# Altium PCB bdcmc25_revised.PcbDoc (part 3 of 4)
Units mm, origin at the board's own origin, x right, y up, seen from the top; angles counter-clockwise.
Board outline 177.8 x 69.85 mm, 4 copper layers (Top Layer, Layer 2 (GND), Layer 3 (GND), Bottom Layer), stack 0.603 mm thick; 363 components, 158 nets, 1074 pads, 732 vias.
Unrouted connection lines stored in the file: 6.
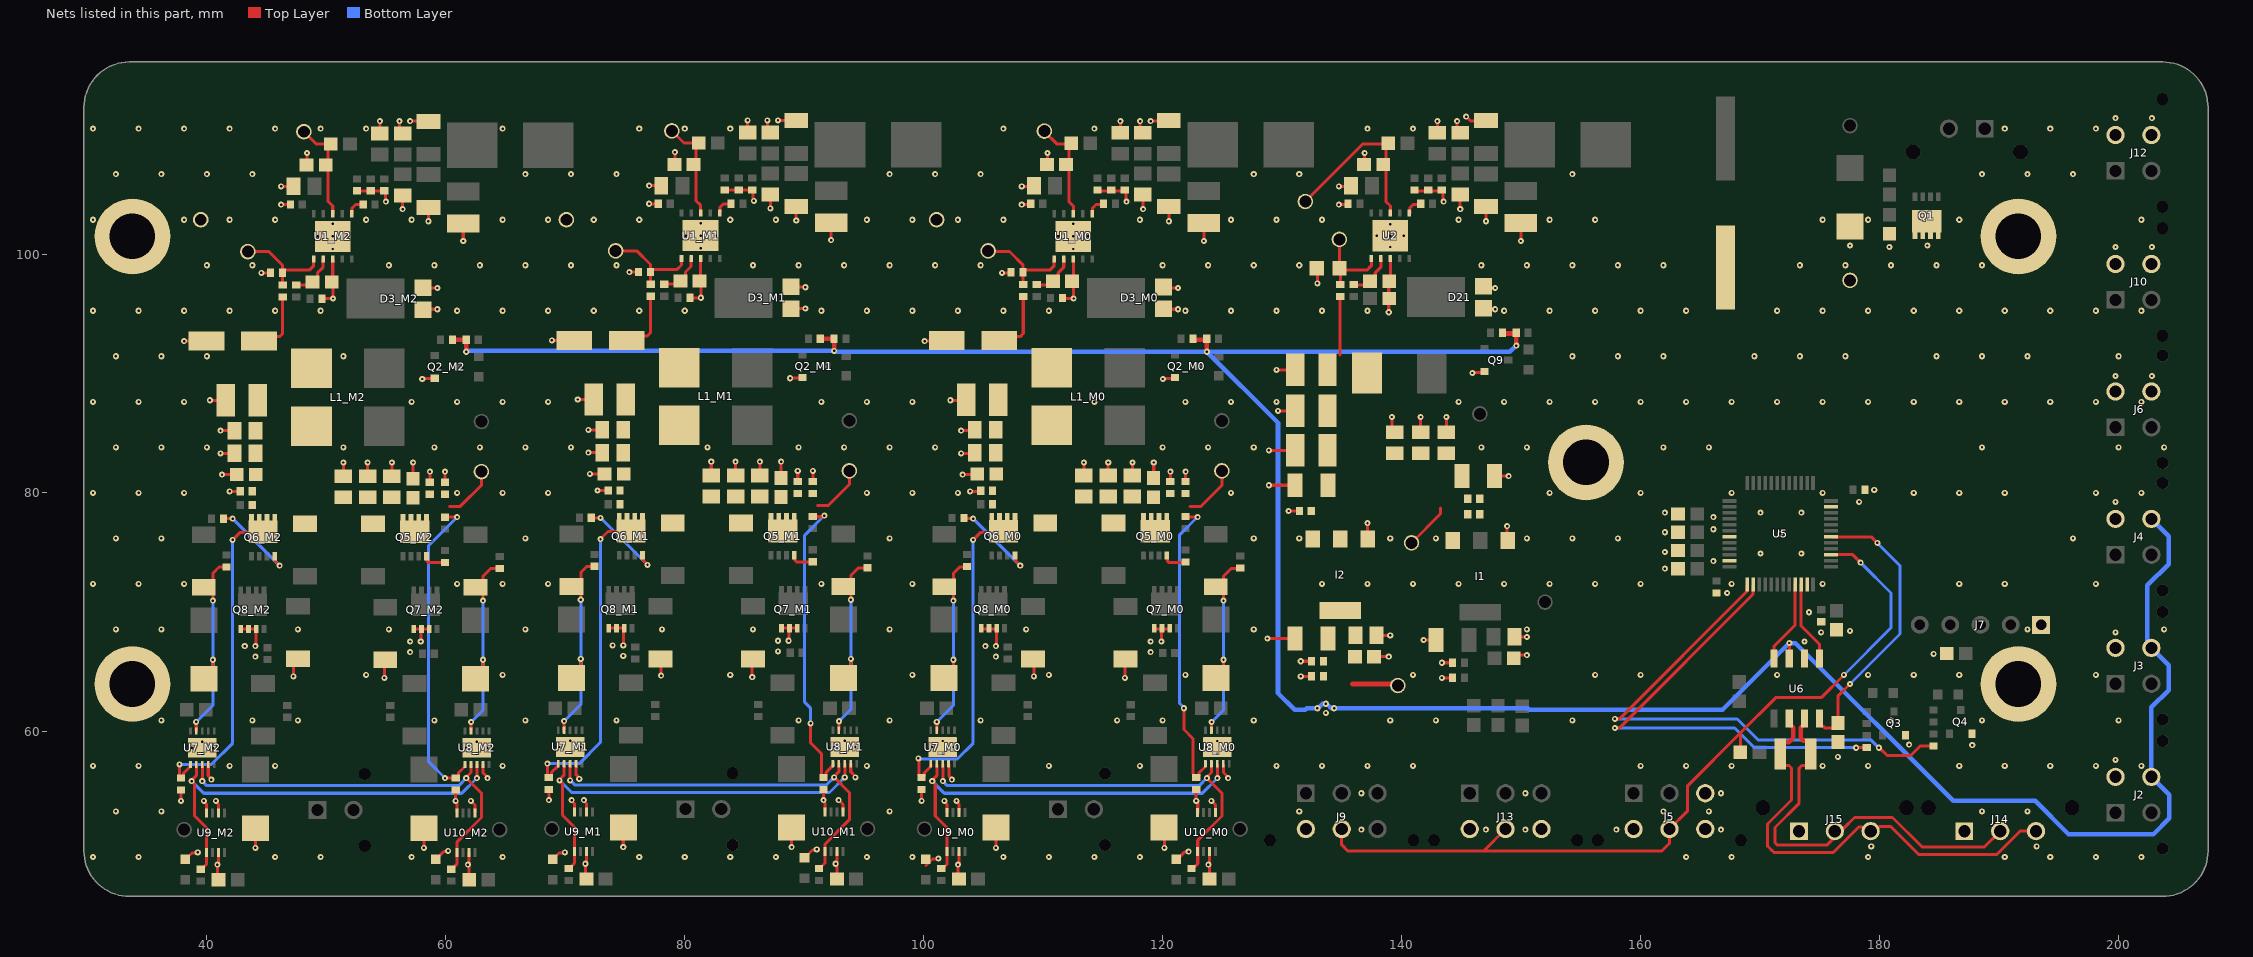
[diagram p4: the nets of this part, all layers, seen from the top]

## Via types
v1: diameter 0.508, hole 0.203, Top Layer to Bottom Layer, 717 vias
v2: diameter 0.508, hole 0.2, Top Layer to Bottom Layer, 15 vias

## Nets (pads, with @x,y where several pads share a name; then routed paths per layer and width w, separated by ;. In a path a pad name is that pad's centre, name@x,y a point inside that pad or via, vN(x,y) a via of type N, cw(c..) or ccw(c..) an arc to the next point about the centre after c; other vN are vias at no path point) (continued)
GND: (continued)
  other v1: 30.48,49.53 34.29,49.53 45.72,49.53 49.53,49.53 57.15,49.53 64.77,49.53 76.2,49.53 80.01,49.53 83.82,49.53 87.63,49.53 95.25,49.53 99.06,49.53 106.68,49.53 110.49,49.53 114.3,49.53 118.11,49.53 163.83,49.53 167.64,49.53 179.07,49.53 190.5,49.53 194.31,49.53 198.12,49.53 201.93,49.53 179.324,50.419 193.167,50.419 136.652,51.816 147.066,51.816 150.368,51.816 157.988,51.816 166.751,51.816 32.385,53.34 36.195,53.34 97.155,53.34 131.445,53.34 161.925,53.34 165.735,53.34 188.595,53.34 192.405,53.34 136.652,54.864 150.368,54.864 166.751,54.864 30.48,57.15 34.29,57.15 41.91,57.15 45.72,57.15 64.77,57.15 95.25,57.15 110.49,57.15 118.11,57.15 129.54,57.15 133.35,57.15 137.16,57.15 140.97,57.15 160.02,57.15 163.83,57.15 167.64,57.15 175.26,57.15 179.07,57.15 186.69,57.15 190.5,57.15 194.31,57.15 198.12,57.15 201.93,57.15 199.771,57.658 176.53,57.912 187.778,58.891 182.499,58.928 36.195,60.96 43.815,60.96 47.625,60.96 59.055,60.96 66.675,60.96 74.295,60.96 89.535,60.96 97.155,60.96 104.775,60.96 116.205,60.96 120.015,60.96 127.635,60.96 139.065,60.96 142.875,60.96 154.305,60.96 180.975,60.96 188.595,60.96 200.025,60.96 53.34,64.77 64.77,64.77 83.82,64.77 99.06,64.77 110.49,64.77 121.92,64.77 140.97,64.77 156.21,64.77 160.02,64.77 171.45,64.77 179.07,64.77 182.88,64.77 186.69,64.77 198.12,64.77 44.069,66.294 106.058,66.294 74.862,66.359 184.541,66.535 57.023,66.675 119.012,66.675 87.816,66.74 43.18,67.183 105.169,67.183 73.973,67.248 57.023,67.564 119.012,67.564 173.736,67.564 87.816,67.629 175.133,68.326 199.771,68.326 177.546,68.453 32.385,68.58 36.195,68.58 47.625,68.58 55.245,68.58 66.675,68.58 78.105,68.58 85.725,68.58 97.155,68.58 108.585,68.58 127.635,68.58 150.495,68.58 192.405,68.58 203.835,68.58 174.117,70.011 167.259,71.628 30.48,72.39 34.29,72.39 38.1,72.39 60.96,72.39 64.77,72.39 68.58,72.39 91.44,72.39 99.06,72.39 133.35,72.39 137.16,72.39 140.97,72.39 144.78,72.39 148.59,72.39 152.4,72.39 156.21,72.39 160.02,72.39 167.64,72.39 175.26,72.39 186.69,72.39 190.5,72.39 198.12,72.39 162.052,73.66 166.116,74.295 170.053,74.93 173.482,74.93 162.052,75.057 32.385,76.2 36.195,76.2 66.675,76.2 97.155,76.2 127.635,76.2 131.445,76.2 139.065,76.2 142.875,76.2 150.495,76.2 154.305,76.2 158.115,76.2 196.215,76.2 171.704,76.581 162.052,76.708 166.116,76.962 166.116,77.978 162.052,78.359 170.053,78.359 173.482,78.359 178.308,79.248 199.771,79.248 30.48,80.01 34.29,80.01 38.1,80.01 60.96,80.01 64.77,80.01 68.58,80.01 95.25,80.01 99.06,80.01 102.87,80.01 125.73,80.01 152.4,80.01 160.02,80.01 167.64,80.01 175.26,80.01 182.88,80.01 186.69,80.01 190.5,80.01 198.12,80.01 201.93,80.01 179.578,80.264 32.385,83.82 36.195,83.82 40.005,83.82 51.435,83.82 59.055,83.82 62.865,83.82 66.675,83.82 70.485,83.82 81.915,83.82 89.535,83.82 93.345,83.82 97.155,83.82 100.965,83.82 120.015,83.82 123.825,83.82 127.635,83.82 146.685,83.82 150.495,83.82 161.925,83.82 165.735,83.82 188.595,83.82 200.025,83.82 203.835,83.82 30.48,87.63 34.29,87.63 38.1,87.63 57.15,87.63 60.96,87.63 64.77,87.63 68.58,87.63 91.44,87.63 95.25,87.63 99.06,87.63 114.3,87.63 121.92,87.63 125.73,87.63 129.54,87.63 144.78,87.63 148.59,87.63 152.4,87.63 156.21,87.63 160.02,87.63 163.83,87.63 167.64,87.63 171.45,87.63 175.26,87.63 179.07,87.63 182.88,87.63 186.69,87.63 190.5,87.63 194.31,87.63 198.12,87.63 201.93,87.63 199.771,89.789 202.819,89.789 32.385,91.44 36.195,91.44 40.005,91.44 51.435,91.44 154.305,91.44 158.115,91.44 161.925,91.44 169.545,91.44 173.355,91.44 177.165,91.44 184.785,91.44 188.595,91.44 192.405,91.44 200.025,91.44 30.48,95.25 34.29,95.25 38.1,95.25 41.91,95.25 45.72,95.25 49.53,95.25 60.96,95.25 64.77,95.25 68.58,95.25 72.39,95.25 76.2,95.25 80.01,95.25 91.44,95.25 95.25,95.25 99.06,95.25 102.87,95.25 106.68,95.25 110.49,95.25 121.92,95.25 125.73,95.25 129.54,95.25 133.35,95.25 137.16,95.25 148.59,95.25 152.4,95.25 156.21,95.25 160.02,95.25 163.83,95.25 171.45,95.25 175.26,95.25 179.07,95.25 182.88,95.25 186.69,95.25 190.5,95.25 194.31,95.25 198.12,95.25 201.93,95.25 40.005,99.06 43.815,99.06 55.245,99.06 59.055,99.06 62.865,99.06 66.675,99.06 70.485,99.06 74.295,99.06 85.725,99.06 89.535,99.06 93.345,99.06 97.155,99.06 100.965,99.06 104.775,99.06 120.015,99.06 123.825,99.06 127.635,99.06 131.445,99.06 146.685,99.06 150.495,99.06 154.305,99.06 158.115,99.06 161.925,99.06 173.355,99.06 177.165,99.06 180.975,99.06 184.785,99.06 188.595,99.06 139.065,100.584 180.848,100.584 199.771,100.584 202.819,100.584 177.546,100.711 184.023,100.711 137.922,101.529 139.065,101.529 140.208,101.529 139.065,102.489 30.48,102.87 38.1,102.87 41.91,102.87 45.72,102.87 53.34,102.87 57.15,102.87 64.77,102.87 68.58,102.87 72.39,102.87 76.2,102.87 83.82,102.87 87.63,102.87 95.25,102.87 99.06,102.87 102.87,102.87 106.68,102.87 118.11,102.87 125.73,102.87 129.54,102.87 133.35,102.87 144.78,102.87 152.4,102.87 156.21,102.87 175.26,102.87 179.07,102.87 186.69,102.87 201.93,102.87 32.385,106.68 36.195,106.68 40.005,106.68 43.815,106.68 66.675,106.68 70.485,106.68 74.295,106.68 97.155,106.68 100.965,106.68 104.775,106.68 127.635,106.68 131.445,106.68 154.305,106.68 188.595,106.68 192.405,106.68 196.215,106.68 30.48,110.49 34.29,110.49 38.1,110.49 41.91,110.49 45.72,110.49 49.53,110.49 53.34,110.49 64.77,110.49 76.2,110.49 80.01,110.49 83.82,110.49 106.68,110.49 114.3,110.49 137.16,110.49 140.97,110.49 190.5,110.49 194.31,110.49 198.12,110.49 199.771,111.379 202.819,111.379
  other v2: 50.546,100.423 112.522,100.423 81.339,100.488 49.296,101.473 50.546,101.473 51.796,101.473 111.272,101.473 112.522,101.473 113.772,101.473 80.089,101.538 81.339,101.538 82.589,101.538 50.546,102.523 112.522,102.523 81.339,102.588
HO_1G_M0: D6_M0.2 D13_M0.2 R22_M0.1 U7_M0.4 | length 17.7
  Top Layer w0.254: v1(101.105,60.833) 101.109,60.829 101.109,60.078 U7_M0.4@101.113,60.074 ; D13_M0.2@101.74,64.445 102.502,65.207 v1(102.502,66.04) ; D6_M0.2@101.74,72.095 D6_M0.2@101.929,72.095 ; v1(102.502,70.993) 102.502,71.522 D6_M0.2@101.929,72.095 ; R22_M0.1@103.645,73.795 103.018,73.795 102.502,73.279 102.502,72.668 D6_M0.2@101.929,72.095
  Bottom Layer w0.254: v1(101.105,60.833) 102.502,62.23 v1(102.502,66.04) v1(102.502,70.993)
HO_1G_M1: D6_M1.2 D13_M1.2 R22_M1.1 U7_M1.4 | length 17.7
  Top Layer w0.254: v1(69.909,60.898) 69.913,60.894 69.913,60.143 U7_M1.4@69.917,60.139 ; D13_M1.2@70.544,64.51 71.306,65.272 v1(71.306,66.105) ; D6_M1.2@70.544,72.16 D6_M1.2@70.733,72.16 ; v1(71.306,71.058) 71.306,71.587 D6_M1.2@70.733,72.16 ; R22_M1.1@72.449,73.86 71.822,73.86 71.306,73.344 71.306,72.733 D6_M1.2@70.733,72.16
  Bottom Layer w0.254: v1(69.909,60.898) 71.306,62.295 v1(71.306,66.105) v1(71.306,71.058)
HO_1G_M2: D6_M2.2 D13_M2.2 R22_M2.1 U7_M2.4 | length 17.7
  Top Layer w0.254: v1(39.116,60.833) 39.12,60.829 39.12,60.078 U7_M2.4@39.124,60.074 ; D13_M2.2@39.751,64.445 40.513,65.207 v1(40.513,66.04) ; D6_M2.2@39.751,72.095 D6_M2.2@39.94,72.095 ; v1(40.513,70.993) 40.513,71.522 D6_M2.2@39.94,72.095 ; R22_M2.1@41.656,73.795 41.029,73.795 40.513,73.279 40.513,72.668 D6_M2.2@39.94,72.095
  Bottom Layer w0.254: v1(39.116,60.833) 40.513,62.23 v1(40.513,66.04) v1(40.513,70.993)
HO_1M_M0: Q6_M0.1 R23_M0.2 | length 7.3
  Top Layer w0.254: R23_M0.2@103.383,77.851 v1(104.153,77.851) ; Q6_M0.1@107.675,74.708 107.709,74.674 107.709,74.295 v1(108.09,73.914)
  Bottom Layer w0.254: v1(104.153,77.851) v1(108.09,73.914)
HO_1M_M1: Q6_M1.1 R23_M1.2 | length 7.3
  Top Layer w0.254: R23_M1.2@72.187,77.916 v1(72.957,77.916) ; Q6_M1.1@76.479,74.773 76.513,74.739 76.513,74.36 v1(76.894,73.979)
  Bottom Layer w0.254: v1(72.957,77.916) v1(76.894,73.979)
HO_1M_M2: Q6_M2.1 R23_M2.2 | length 7.3
  Top Layer w0.254: R23_M2.2@41.394,77.851 v1(42.164,77.851) ; Q6_M2.1@45.686,74.708 45.72,74.674 45.72,74.295 v1(46.101,73.914)
  Bottom Layer w0.254: v1(42.164,77.851) v1(46.101,73.914)
HO_2G_M0: D7_M0.2 D14_M0.2 R25_M0.1 U8_M0.4 | length 17.4
  Top Layer w0.254: U8_M0.4@124.1,60.074 124.107,60.081 124.107,60.261 124.116,60.271 v1(124.116,60.825) ; D14_M0.2@124.473,64.445 125.108,65.08 v1(125.108,66.04) ; D7_M0.2@124.473,72.095 124.535,72.095 D7_M0.2@124.662,71.968 ; D7_M0.2@124.773,71.968 D7_M0.2@124.662,71.968 ; D7_M0.2@124.773,72.095 125.11,72.432 125.11,73.027 125.751,73.668 R25_M0.1@126.505,73.668 ; v1(125.108,70.993) 125.108,71.522 D7_M0.2@124.662,71.968
  Bottom Layer w0.254: v1(124.116,60.825) 125.108,61.816 v1(125.108,66.04) v1(125.108,70.993)
HO_2G_M1: D7_M1.2 D14_M1.2 R25_M1.1 U8_M1.4 | length 17.4
  Top Layer w0.254: U8_M1.4@92.904,60.139 92.911,60.146 92.911,60.326 92.921,60.336 v1(92.921,60.89) ; D14_M1.2@93.277,64.51 93.912,65.145 v1(93.912,66.105) ; D7_M1.2@93.277,72.16 93.339,72.16 D7_M1.2@93.466,72.033 ; D7_M1.2@93.577,72.033 D7_M1.2@93.466,72.033 ; D7_M1.2@93.577,72.16 93.914,72.497 93.914,73.092 94.555,73.733 R25_M1.1@95.309,73.733 ; v1(93.912,71.058) 93.912,71.587 D7_M1.2@93.466,72.033
  Bottom Layer w0.254: v1(92.921,60.89) 93.912,61.881 v1(93.912,66.105) v1(93.912,71.058)
HO_2G_M2: D7_M2.2 D14_M2.2 R25_M2.1 U8_M2.4 | length 17.4
  Top Layer w0.254: U8_M2.4@62.111,60.074 62.118,60.081 62.118,60.261 62.128,60.271 v1(62.128,60.825) ; D14_M2.2@62.484,64.445 63.119,65.08 v1(63.119,66.04) ; D7_M2.2@62.484,72.095 62.546,72.095 D7_M2.2@62.673,71.968 ; D7_M2.2@62.784,71.968 D7_M2.2@62.673,71.968 ; D7_M2.2@62.784,72.095 63.121,72.432 63.121,73.027 63.762,73.668 R25_M2.1@64.516,73.668 ; v1(63.119,70.993) 63.119,71.522 D7_M2.2@62.673,71.968
  Bottom Layer w0.254: v1(62.128,60.825) 63.119,61.816 v1(63.119,66.04) v1(63.119,70.993)
HO_2M_M0: Q5_M0.1 R24_M0.1 | length 2
  Top Layer w0.254: Q5_M0.1@120.375,74.708 120.409,74.674 120.409,74.317 120.557,74.168 121.925,74.168 R24_M0.1@121.933,74.176
HO_2M_M1: Q5_M1.1 R24_M1.1 | length 2
  Top Layer w0.254: Q5_M1.1@89.179,74.773 89.213,74.739 89.213,74.382 89.362,74.233 90.729,74.233 R24_M1.1@90.737,74.241
HO_2M_M2: Q5_M2.1 R24_M2.1 | length 2
  Top Layer w0.254: Q5_M2.1@58.386,74.708 58.42,74.674 58.42,74.317 58.569,74.168 59.936,74.168 R24_M2.1@59.944,74.176
I2C1_SCL: J5.5 J9.5 J13.5 R15.2 U5.39 | length 70.6
  Top Layer w0.254: J9.5@135.001,51.864 135.001,50.546 135.514,50.033 146.886,50.033 ; J13.5@148.717,51.864 146.886,50.033 ; R15.2@168.364,58.293 168.364,59.906 ; U5.39@175.954,74.831 177.772,74.831 v1(178.435,74.168) ; v1(177.038,64.77) 175.133,62.865 171.323,62.865 168.364,59.906 ; 146.886,50.033 161.793,50.033 162.433,50.673 J5.5@162.433,51.864 163.957,53.388 163.957,55.499 168.364,59.906
  Bottom Layer w0.254: v1(177.038,64.77) 180.975,68.707 180.975,71.628 v1(178.435,74.168)